# Altium PCB 超声波.PcbDoc
Units mil, origin at the board's own origin, x right, y up, seen from the top; angles counter-clockwise.
Board outline 3930 x 3915 mil, 2 copper layers (Top Layer, Bottom Layer); 15 components, 41 nets, 104 pads, 0 vias.
Unrouted connection lines stored in the file: 2.
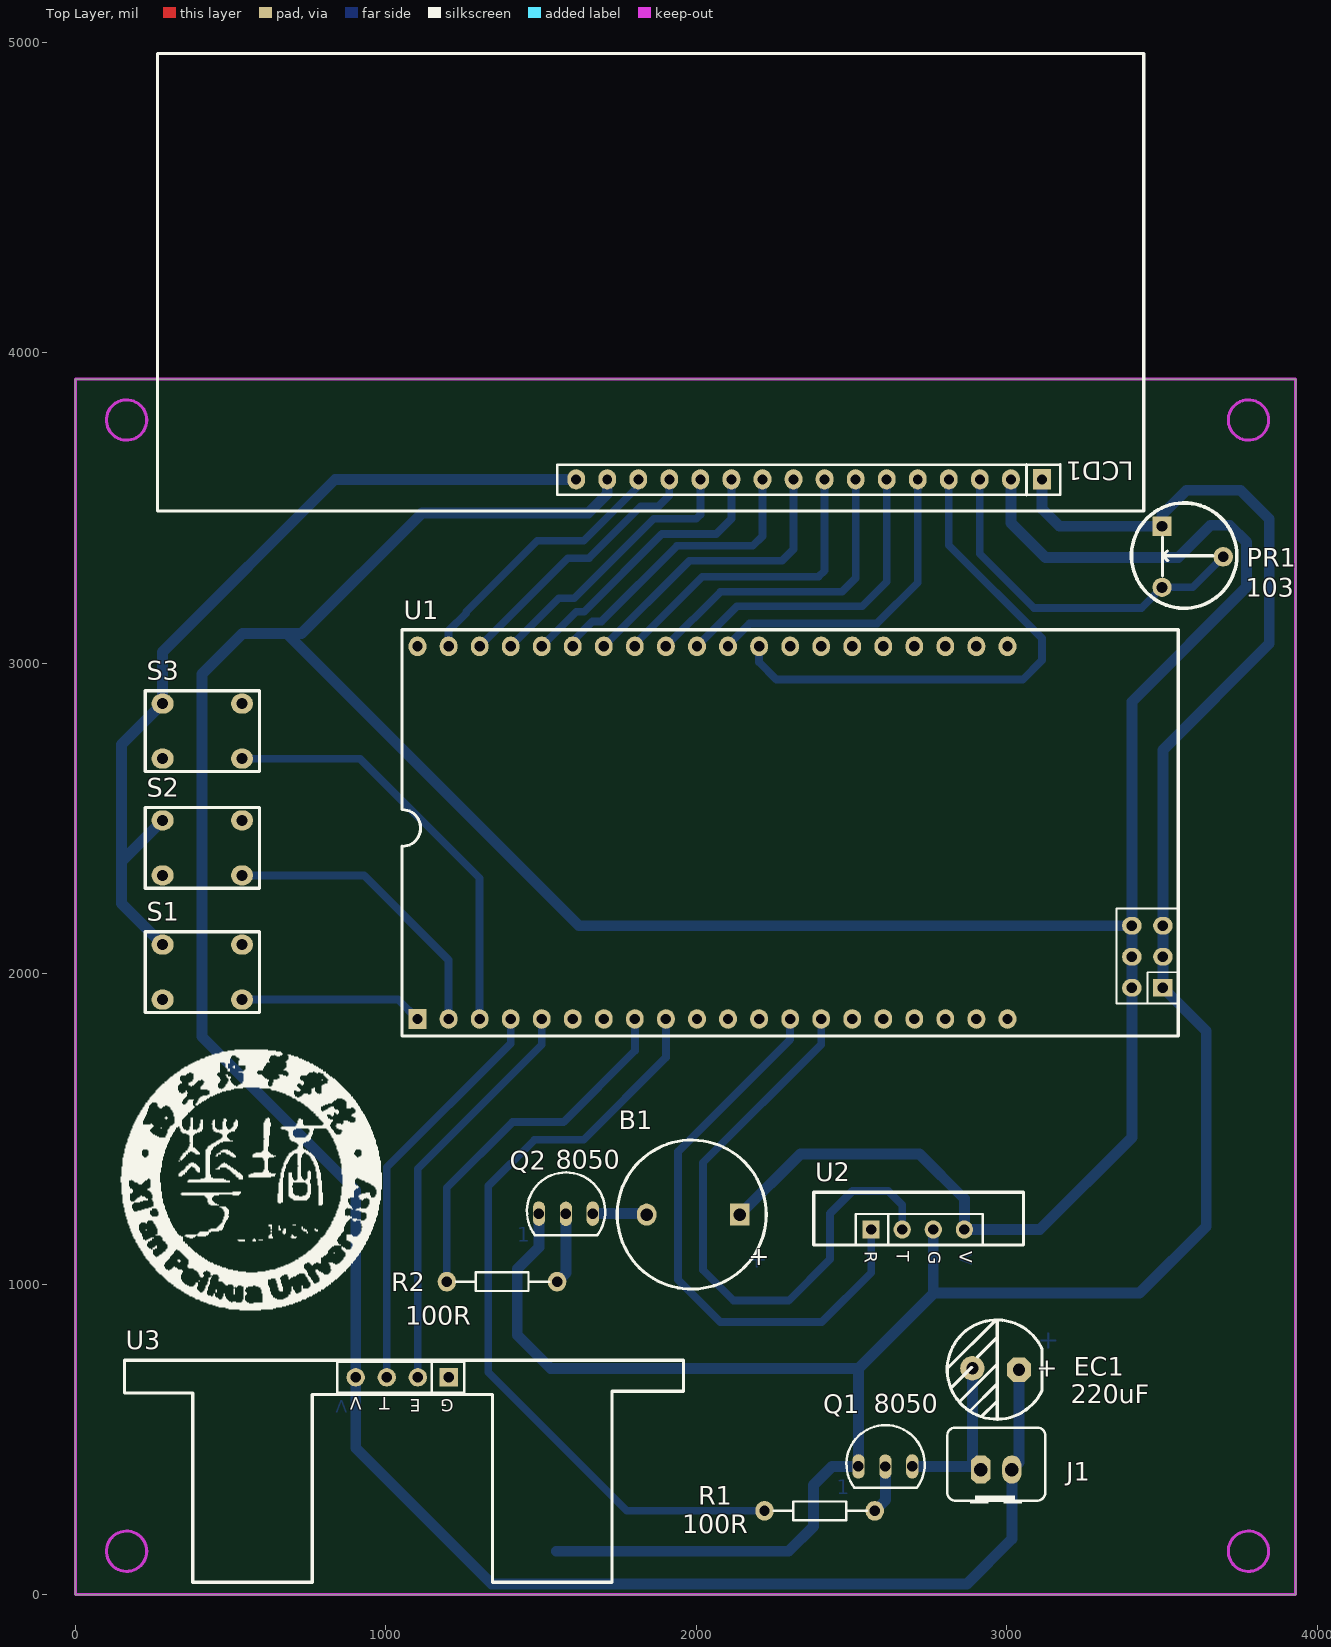
[diagram p0: Top Layer view]
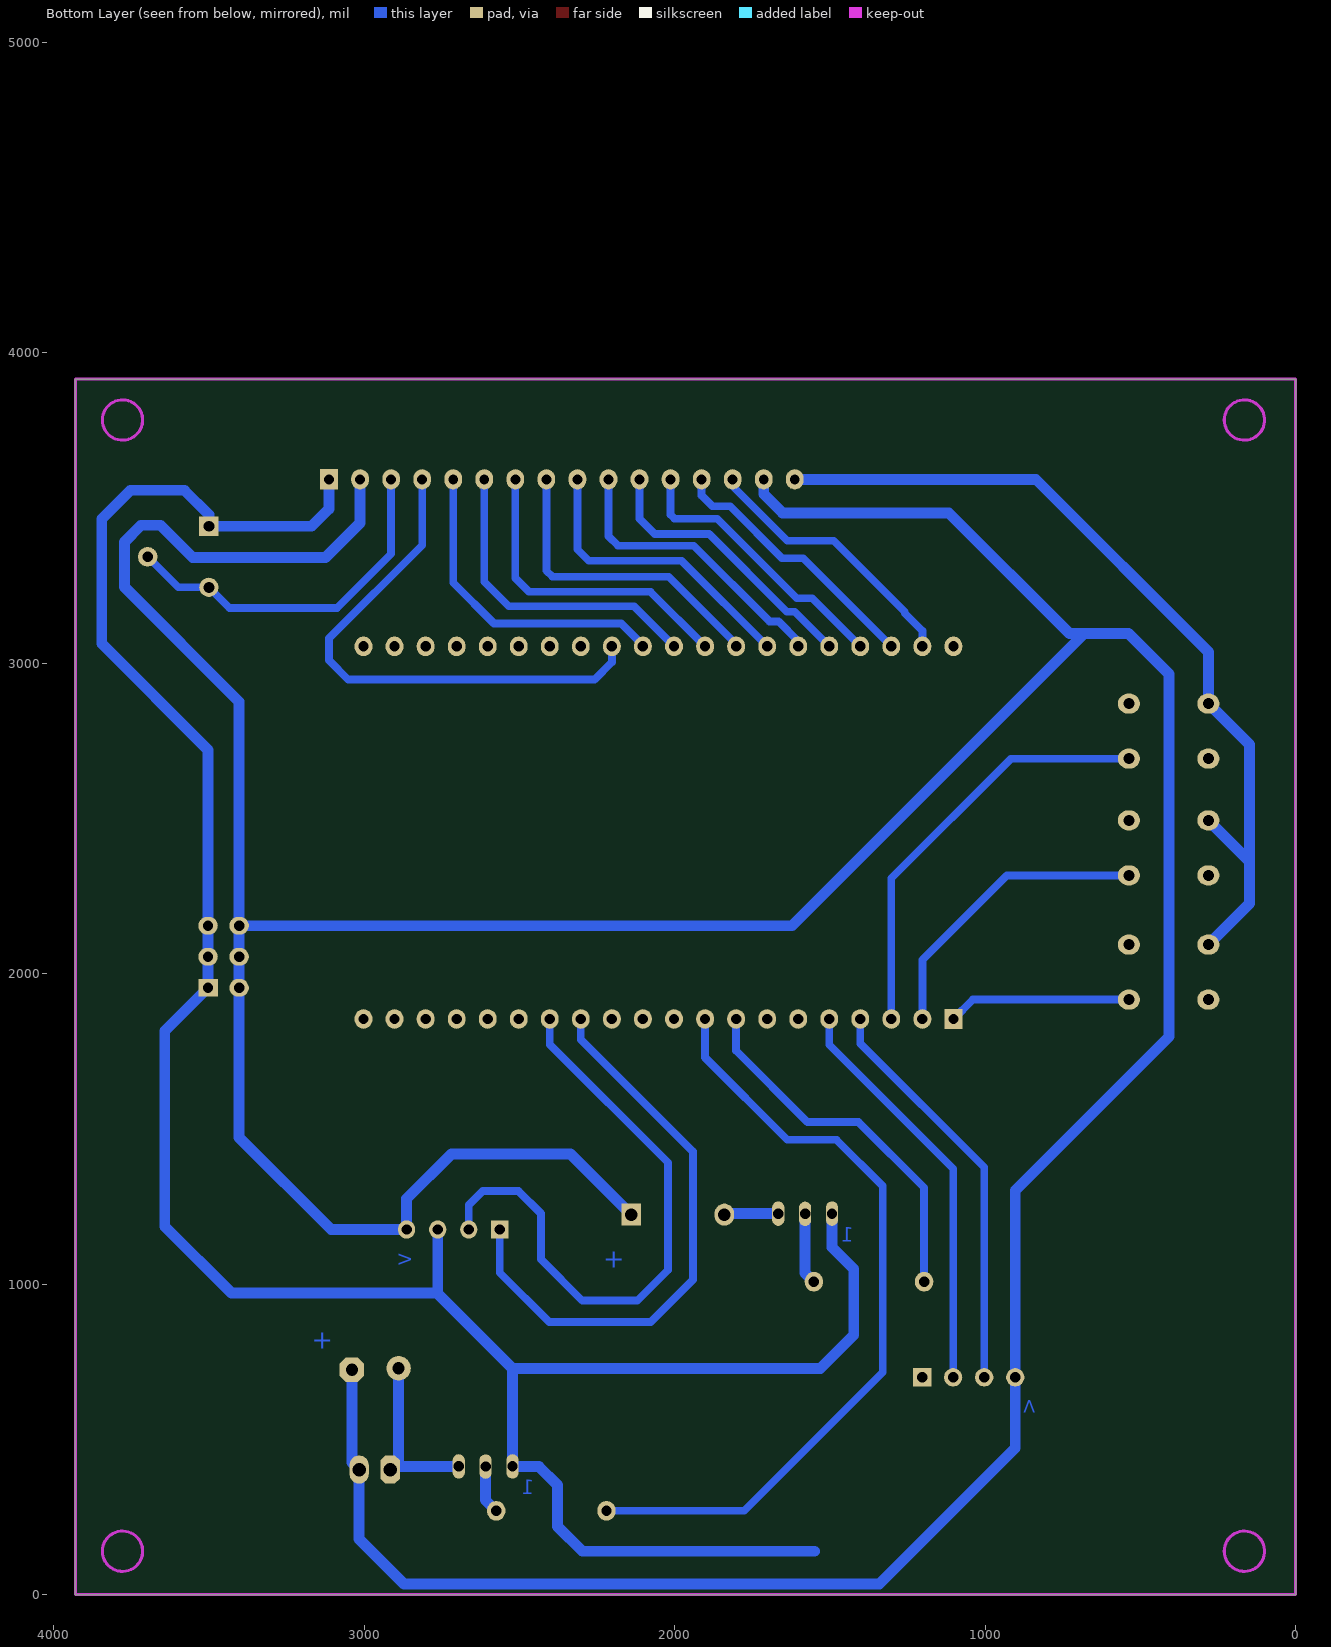
[diagram p1: Bottom Layer view, seen from below]

## Layer stack, top to bottom
Top Solder: solder mask 0.4, Solder Resist, Dk 3.5
Top Layer: signal copper 1.4
Dielectric1: dielectric 12.6, FR-4, Dk 4.8
Bottom Layer: signal copper 1.4
Bottom Solder: solder mask 0.4, Solder Resist, Dk 3.5

## Board outline
0,0 0,3915 3930,3915 3930,0

## Design rules (kind name [scope] priority, off if disabled: settings)
Clearance [All] p1: gap=12
ComponentClearance [All] p1 off: gap=10 collisioncheckmode=3 verticalgap=10 showdistances=FALSE
FabricationTestpoint [(IsPad And (OnTopLayer Or OnBottomLayer))] p1: side=3 testpointundercomponent=TRUE minsize=40 maxsize=100 preferedsize=60 minholesize=0 maxholesize=40 preferedholesize=32 testpointgrid=1 allowsidetop=TRUE allowsidebottom=TRUE usegrid=TRUE gridtolerance=0.01
Height [All] p1 off: minheight=0 maxheight=1000 prefheight=500
HoleSize [All] p1 off: absolutevalues=TRUE maxlimit=100 minlimit=1 maxpercent=80.000 minpercent=20.000
LayerPairs [All] p1 off: enforce=TRUE
PlaneClearance [All] p1 off: clearance=20
PlaneConnect [All] p1 off: planeconnectstyle=Relief reliefexpansion=20 reliefentries=4 reliefconductorwidth=10 reliefairgap=10
PolygonConnect [All] p1 off: connectstyle=Relief reliefconductorwidth=10 reliefentries=4 polygonreliefangle="90 Angle" airgapwidth=10
RoutingVias [All] p1: holewidth=28 width=50 viastyle="Through Hole" minholewidth=28 minwidth=50 maxholewidth=28 maxwidth=50
SilkToSolderMaskClearance SilkscreenOverComponentPads [IsPad] p1: minsilkscreentomaskgap=10 clearancetoexposedcopper=TRUE
SolderMaskExpansion [All] p1: expansion=4
Width [All] p1: maxlimit=100 minlimit=12 preferedwidth=20
22 further rules are at their usual default settings.

## Components (designator, comment, footprint, x,y, rotation, side; value= is the part's Value field where it differs from the comment)
B1 "BUZZER" BUZZERSOT_PLASTIC 2140,1224 r180 top
EC1 "220uF" RB.15/.3 3039,724 r180 top
J1 "水泵接线端子" XH-2.54-2P 2916,403 r0 top
LCD1 "LCD1602" LCD1602 3113,3592 r180 top
PR1 "103" WH06-2 3500,3441 r270 top
Q1 "8050" TO-92 2522,413 r0 top
Q2 "8050" TO-92 1493,1227 r0 top
R1 "100R" AXIAL0.3 2397,270 r180 top
R2 "100R" AXIAL0.3 1374,1008 r180 top
S1 "BUTTOM" BUTTOM_6x6DIP 409,2005 r0 top
S2 "BUTTOM" BUTTOM_6x6DIP 409,2405 r0 top
S3 "BUTTOM" BUTTOM_6x6DIP 409,2781 r0 top
U1 "STM32_CORE" STM32_CORE 1102,1854 r90 top
U2 "预留串口" 蓝牙MODE竖放 2563,1176 r270 top
U3 "超声波MODE" 超声波MODE 1053,755 r180 top

## Footprints (in the part's own frame and the unit in brackets; to place one, negate y for a bottom-side part, rotate by r counter-clockwise, add the part's x,y. Pads: shape width x height; smd on the part's side, far side on the other; paste and mask are expansions set on the pad)
AXIAL0.3 [mm]
  oval 1.5x1.6 hole 0.85: 1(-4.508,0) 2(4.508,0)
  silkscreen extent -3.87,-0.76 3.75,0.76
BUTTOM_6x6DIP [mm]
  oval 1.8x1.65 hole 0.9: 1(-3.25,2.25) 2(3.25,-2.25) ""(-3.25,-2.25) ""(3.25,2.25)
  round 1 on Top Overlay: 3(0,0)
  silkscreen extent -4.67,-3.3 4.67,3.3
BUZZERSOT_PLASTIC [mm]
  rect 1.6x1.8 hole 1.016: 1(0,0)
  oval 1.6x1.8 hole 1.016: 2(7.62,0)
  silkscreen extent -2.16,-6.1 10.03,6.1
LCD1602 [mm]
  rect 1.45x1.65 hole 0.813: 1(0,0)
  oval 1.45x1.65 hole 0.813: 2(2.54,0) 3(5.08,0) 4(7.62,0) 5(10.16,0) 6(12.7,0) 7(15.24,0) 8(17.78,0) 9(20.32,0) 10(22.86,0) 11(25.4,0) 12(27.94,0) 13(30.48,0) 14(33.02,0) 15(35.56,0) 16(38.1,0)
  silkscreen extent -8.33,-34.85 72.35,2.58
RB.15/.3 [mm]
  oct 2x2 hole 1: 1(-0.002,-0.004)
  round 2 hole 1: 2(3.81,-0.127)
  silkscreen extent -1.89,-4.09 5.87,4.04
STM32_CORE [mm]
  rect 1.6x1.45 hole 0.85: 1(0,0)
  oval 1.6x1.45 hole 0.85: 2(0,-2.54) 3(0,-5.08) 4(0,-7.62) 5(0,-10.16) 6(0,-12.7) 7(0,-15.24) 8(0,-17.78) 9(0,-20.32) 10(0,-22.86) 11(0,-25.4) 12(0,-27.94) 13(0,-30.48) 14(0,-33.02) 15(0,-35.56) 16(0,-38.1) 17(0,-40.64) 18(0,-43.18) 19(0,-45.72) 20(0,-48.26) 21(30.48,-48.26) 22(30.48,-45.72) 23(30.48,-43.18) 24(30.48,-40.64) 25(30.48,-38.1) 26(30.48,-35.56) 27(30.48,-33.02) 28(30.48,-30.48) 29(30.48,-27.94) 30(30.48,-25.4) 31(30.48,-22.86) 32(30.48,-20.32) 33(30.48,-17.78) 34(30.48,-15.24) 35(30.48,-12.7) 36(30.48,-10.16) 37(30.48,-7.62) 38(30.48,-5.08) 39(30.48,-2.54) 40(30.48,0)
  rect 1.45x1.6 hole 0.85: 41(2.55,-60.975)
  oval 1.45x1.6 hole 0.85: 42(2.55,-58.435) 43(5.09,-60.975) 44(5.09,-58.435) 45(7.63,-60.975) 46(7.63,-58.435)
  silkscreen extent -1.4,-62.25 31.84,1.27
TO-92 [mm]
  oval 1x2 hole 0.85: 1(0,0) 2(2.205,-0.009) 3(4.4,0)
  silkscreen extent -0.98,-1.75 5.42,3.38
WH06-2 [mil]
  rect 62x62 hole 35: 1(0,0)
  round 62.99 hole 35: 2(98.43,196.85)
  round 62 hole 35: 3(196.85,0)
  silkscreen extent -75,-98 264,241
XH-2.54-2P [mm]
  oct 1.575x2.3 hole 1.1: 1(0,0)
  oval 1.575x2.3 hole 1.1: 2(2.54,0)
  silkscreen extent -2.75,-2.79 5.29,3.43
蓝牙MODE竖放 [mm]
  rect 1.5x1.4 hole 0.85: 1(0,0)
  oval 1.5x1.4 hole 0.85: 2(0,2.54) 3(0,5.08) 4(0,7.62)
  silkscreen extent -3.05,-4.7 1.27,12.45
超声波MODE [mm]
  rect 1.5x1.5 hole 0.85: 1(-3.81,1.397)
  round 1.5 hole 0.85: 2(-1.27,1.397) 3(1.27,1.397) 4(3.81,1.397)
  silkscreen extent -22.99,0 22.73,18.16

## Part data
B1: "蜂鸣器"
EC1: library part CAP_EC, "极性电容"
J1: library part CON2, "接线端子2芯"
LCD1: "LCD1602液晶"
PR1: library part PR, "电位器"
Q1 Q2: library part 9013, "三极管"
R1 R2: library part RES, "电阻"
S1 S2 S3: "按键"
U1: "STM32核心板"
U2: library part 蓝牙MODE
U3: "超声波模块"

## Nets (pads, with @x,y where several pads share a name; then routed paths per layer and width w, separated by ;. In a path a pad name is that pad's centre, name@x,y a point inside that pad or via, vN(x,y) a via of type N, cw(c..) or ccw(c..) an arc to the next point about the centre after c; other vN are vias at no path point)
GND: LCD1.1 LCD1.16 PR1.1 Q1.1 Q2.1 S1.1 S2.1 S3.1 U1.41 U1.43 U1.45 U2.3 U3.1 | length 10794.9
  Bottom Layer w35: S1.1 149,2225.63 149,2361.53 ; S2.1 149,2361.53 ; Q2.1 1493,1119 1423,1049 1423,836 1531,728 2522,728 ; 1549,140 2297,140 2377,220 2377,352.7 2437.3,413 Q1.1 2522,728 ; LCD1.16 837,3592 281.05,3036.05 S3.1 149,2737.53 149,2361.53 ; U2.3 2763,973 2765,971 ; LCD1.1 3113,3497 3169,3441 PR1.1 3500,3478 3579,3557 3752,3557 3845,3464 3845,3063 3502.6,2720.6 U1.45 U1.43 U1.41 3642,1815 3642,1186 3427,971 2765,971 ; 2522,728 2765,971
NetB1_2: B1.2 Q2.3 | length 175
  Bottom Layer w35: Q2.3 1837,1227 B1.2
NetEC1_2: EC1.2 J1.1 Q1.3 | length 548
  Bottom Layer w35: Q1.3 J1.1@2906,413 ; EC1.2 2889,430 J1.1@2906,413 ; J1.1 J1.1@2906,413
NetLCD1_3: LCD1.3 PR1.2 PR1.3 | length 1164.1
  Bottom Layer w25: LCD1.3 2913,3352 3087,3178 3433.85,3178 PR1.3 3598.43,3244.15 PR1.2
NetQ1_2: Q1.2 R1.1 | length 156.9
  Bottom Layer w35: R1.1 2608.81,304.31 Q1.2
NetQ2_2: Q2.2 R2.1 | length 230.4
  Bottom Layer w35: R2.1 1579.81,1036.31 Q2.2
PA0: U1.4 U3.3 | length 1319.3
  Bottom Layer w25: U3.3 1003,1376 1402,1775 U1.4
PA1: U1.5 U3.2 | length 1319.3
  Bottom Layer w25: U3.2 1103,1372 1502,1771 U1.5
PA2: U1.6
PA3: U1.7
PA4: R2.2 U1.8 | length 1192.9
  Bottom Layer w25: R2.2 1196.5,1310.5 1408,1522 1572,1522 1802,1752 U1.8
PA5: R1.2 U1.9 | length 2541.7
  Bottom Layer w25: U1.9 1902,1730 1637,1465 1479,1465 1330,1316 1330,716 1776,270 R1.2
PA6: U1.10
PA7: U1.11
PA8: U1.12
PA9: U1.13 U2.1 | length 1872.7
  Bottom Layer w25: U1.13 2302,1788 1941,1427 1941,1014 2077,878 2404,878 2563,1037 U2.1
PA10: U1.14 U2.2 | length 1978.8
  Bottom Layer w25: U1.14 2402,1772 2021,1391 2021,1046 2120,947 2297,947 2430.5,1080.5 2430.5,1227.5 2503,1300 2618,1300 2663,1255 U2.2
PA11: U1.15
PA12: U1.16
PA15: U1.17
PB0: U1.24
PB1: U1.25
PB2: U1.26
PB3: U1.27
PB4: U1.28
PB5: LCD1.4 U1.29 | length 1718.1
  Bottom Layer w25: U1.29 2202,3003 2258,2947 3051,2947 3113,3009 3113,3080 2813,3380 LCD1.4
PB6: LCD1.5 U1.30 | length 1034.1
  Bottom Layer w25: U1.30@2100,3056 U1.30 2102,3058 2171.5,3127.5 2581.5,3127.5 2713,3259 LCD1.5
PB7: LCD1.6 U1.31 | length 1030
  Bottom Layer w25: U1.31@2000,3056 U1.31 2131,3183 2534,3183 2613,3262 LCD1.6
PB8: LCD1.7 U1.32 | length 1023
  Bottom Layer w25: U1.32@1900,3056 U1.32 2078,3230 2469,3230 2513,3274 LCD1.7
PB9: LCD1.8 U1.33 | length 1013
  Bottom Layer w25: U1.33@1800,3056 U1.33 1802,3061 2019,3278 2393,3278 2413,3298 LCD1.8
PB10: LCD1.9 U1.34 | length 968.5
  Bottom Layer w25: U1.34@1700,3056 U1.34 1978,3330 2276,3330 2313,3367 LCD1.9
PB11: LCD1.10 U1.35 | length 953.8
  Bottom Layer w25: U1.35@1600,3056 U1.35 1602,3071 1665.5,3134.5 1694.5,3134.5 1938,3378 2182,3378 2213,3409 LCD1.10
PB12: LCD1.11 U1.36 | length 911.1
  Bottom Layer w25: U1.36@1500,3056 U1.36 1613.5,3165.5 1638.5,3165.5 1889,3416 2064,3416 2113,3465 LCD1.11
PB13: LCD1.12 U1.37 | length 903.5
  Bottom Layer w25: U1.37@1400,3056 U1.37 1557,3209 1607,3209 1863,3465 2000,3465 2013,3478 LCD1.12
PB14: LCD1.13 U1.38 | length 867.1
  Bottom Layer w25: U1.38@1300,3056 U1.38 1586,3338 1654,3338 1821,3505 1878,3505 1913,3540 LCD1.13
PB15: LCD1.14 U1.39 | length 881.2
  Bottom Layer w25: U1.39@1200,3056 U1.39 1202,3104 1259,3161 1259,3165 1488,3394 1637,3394 1813,3570 LCD1.14
PC13: S1.2 U1.1 | length 590.9
  Bottom Layer w25: S1.2 1039.58,1916.42 U1.1
PC14: S2.2 U1.2 | length 967.9
  Bottom Layer w25: S2.2 929.58,2316.42 1202,2044 U1.2
PC15: S3.2 U1.3 | length 1377.7
  Bottom Layer w25: S3.2 916.58,2692.42 1302,2307 U1.3
VCC_3.3V: U1.40
VCC_5V: B1.1 EC1.1 J1.2 LCD1.2 LCD1.15 U1.42 U1.44 U1.46 U2.4 U3.4 | length 15016.7
  Bottom Layer w35: LCD1.15 1713,3545 1652,3484 1117,3484 728,3095 681,3095 ; B1.1 2335,1419 2719,1419 2863,1275 U2.4 3106,1176 3402.6,1472.6 U1.42 U1.44 U1.46 ; LCD1.2 3013,3451 3124,3340 3552,3340 3656,3444 3718,3444 3772,3390 3772,3245 3402.6,2875.6 U1.46 ; EC1.1 3039.09,426.09 J1.2 3016,179 2871.5,34.5 1341,34.5 903,472.5 U3.4 903,1302 408,1797 408,2965 538,3095 681,3095 ; 681,3095 1621.6,2154.4 U1.46
pads on no net: S1. S1.3 S2. S2.3 S3. S3.3 U1.18 U1.19 U1.20 U1.21 U1.22 U1.23

## Keep-outs
Keep-Out Layer:
  circle w10: c165.04,140 r64.96
  circle w10: c165.04,3783 r64.96
  circle w10: c3778.04,3783 r64.96
  circle w10: c3778.04,140 r64.96
  lines w10: 0,0 3930,0 3930,3915 0,3915 0,0

## Silkscreen, mask and mechanical layers (free items; w line width, h text height)
Top Overlay:
  drawing of 1729 lines, arcs and shapes, not listed

## Dimensions
-1,3907 to 6,-2 on Top Overlay
3930,3922 to 0,3915 on Top Overlay

## Text inside footprints (layer, text, board x,y; h text height)
B1: Bottom Layer "+" at 2230,1104 h60 r180; Top Overlay "+" at 2237,1113 h60 r180
EC1: Bottom Layer "+" at 3169,844 h60 r180; Top Overlay "+" at 3164,754 h60 r180
Q1: Bottom Layer "1" at 2452,323 h47.24
Q2: Bottom Layer "1" at 1423,1137 h47.24
U2: Bottom Layer "V" at 2848,1061 h40 r270; Top Overlay "V" at 2848,1106 h40 r270; Top Overlay "R" at 2543,1106 h40 r270; Top Overlay "G" at 2746.33,1106 h40 r270; Top Overlay "T" at 2644.67,1106 h40 r270
U3: Bottom Layer "V" at 839,626 h40 r180; Top Overlay "E" at 1113,630 h40 r180; Top Overlay "T" at 1013,635 h40 r180; Top Overlay "G" at 1218,630 h40 r180; Top Overlay "V" at 923,635 h40 r180